# EAGLE board vibro4-1 copy (EAGLE 5.04)
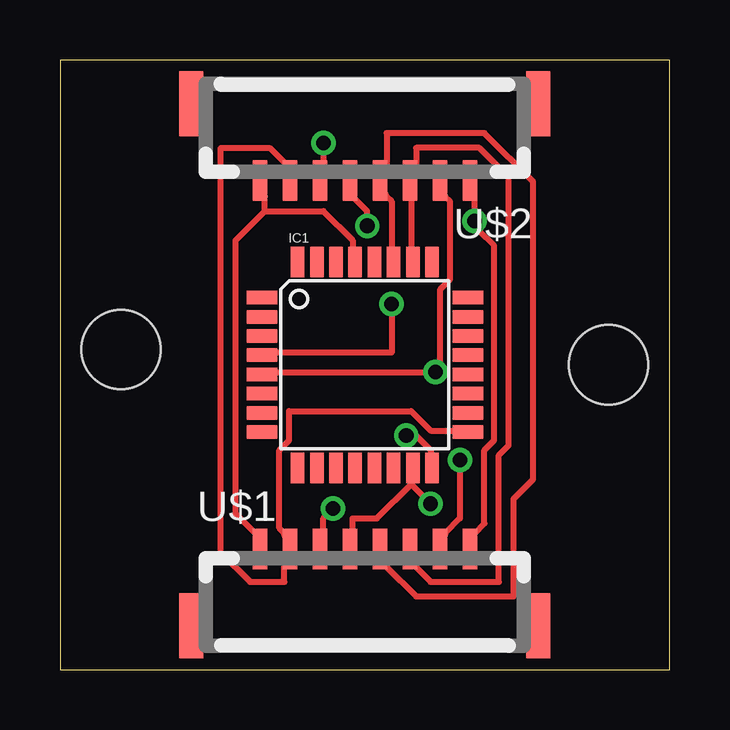
[diagram p0: board, top side]
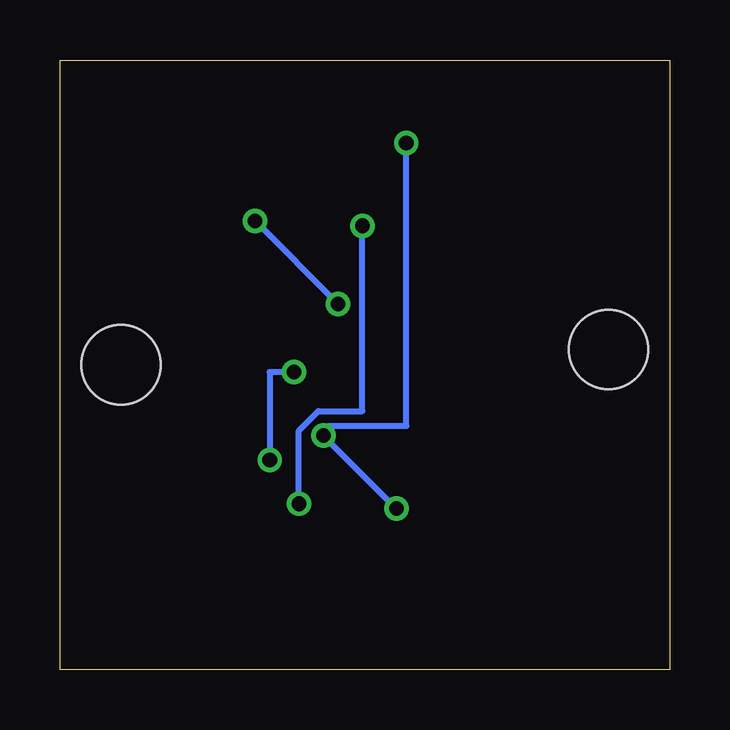
[diagram p1: board, bottom side, seen from below]

Size 25.4 x 25.4 mm. Coordinates in mm from the lower left corner, seen from the top.
Outline: 0,0 25.4,0 25.4,25.4 0,25.4 0,0
Copper layers (1*16): Top 0.035mm / dielectric 1.5mm / Bottom 0.035mm
Design rules "default": minimum track width 10mil, minimum drill 24mil, track to track 8mil, track to pad 8mil, pad to pad 8mil, via to via 8mil, smd to smd 8mil, copper to edge 40mil, drill to drill 8mil, minimum pad ring 10mil, minimum via ring 8mil, stop-mask expansion 4mil, vias tented up to drill 0mil, thermal gap 10mil

## Footprints (pad centres in the part's own frame; a part is rotated, then mirrored left to right if it is on the bottom)
TQFP32-08 = smd 1.27 x 0.559: 1 -4.293,2.8; 2 -4.293,2; 3 -4.293,1.2; 4 -4.293,0.4; 5 -4.293,-0.4; 6 -4.293,-1.2; 7 -4.293,-2; 8 -4.293,-2.8; 17 4.293,-2.8; 18 4.293,-2; 19 4.293,-1.2; 20 4.293,-0.4; 21 4.293,0.4; 22 4.293,1.2; 23 4.293,2; 24 4.293,2.8 | smd 0.559 x 1.27: 9 -2.8,-4.293; 10 -2,-4.293; 11 -1.2,-4.293; 12 -0.4,-4.293; 13 0.4,-4.293; 14 1.2,-4.293; 15 2,-4.293; 16 2.8,-4.293; 25 2.8,4.293; 26 2,4.293; 27 1.2,4.293; 28 0.4,4.293; 29 -0.4,4.293; 30 -1.2,4.293; 31 -2,4.293; 32 -2.8,4.293
SM08B-GHS-TB = smd 0.6 x 1.7: P$1 -4.375,1.85; P$2 -3.125,1.85; P$3 -1.875,1.85; P$4 -0.625,1.85; P$5 0.625,1.85; P$6 1.875,1.85; P$7 3.125,1.85; P$8 4.375,1.85 | smd 1 x 2.7: P$9 7.225,-1.35; P$10 -7.225,-1.35
STAND-OFF = hole 3.302: 0,0

## Placement (x,y rotation side)
IC1  ATTINY48  [TQFP32-08]  12.7,12.7 0 top
U$1  SM08B-GHS-TB  [SM08B-GHS-TB]  12.7,3.17 0 top
U$2  SM08B-GHS-TB  [SM08B-GHS-TB]  12.7,22.23 180 top
U$4  STAND-OFF  [STAND-OFF]  2.54,13.34 0 top
U$5  STAND-OFF  [STAND-OFF]  22.86,12.7 0 top

## Library data of the parts
IC1 U$4 U$5 = SparkFun
U$1 U$2 = con-jst-cubic

## Nets
N$1: IC1.4 U$1.P$8 U$2.P$1
N$2: IC1.5 U$1.P$7 U$2.P$2
N$3: IC1.26 U$1.P$6 U$2.P$3
N$4: IC1.27 U$1.P$5 U$2.P$4
N$5: IC1.15 U$1.P$4 U$2.P$5
N$6: IC1.16 U$1.P$3 U$2.P$6
N$7: IC1.17 U$1.P$2 U$2.P$7
N$8: IC1.29 U$1.P$1 U$2.P$8

## Tracks (layer width: path | path; a pad name or v marks a point on that pad's centre or on a via)
N$1  (via drill 0.61)
  Top 0.254: v13.82,15.24 13.82,13.21 8.94,13.21 IC1.4 | U$2.P$1 17.27,19.71 v17.27,18.69 17.48,18.29 18.09,17.68 18.09,9.55 17.68,9.14 17.68,6.1 17.27,5.69 U$1.P$8
  Bottom 0.254: v17.27,18.69 v13.82,15.24
N$2  (via drill 0.61)
  Top 0.254: IC1.5 8.94,12.39 v15.65,12.39 15.85,12.39 15.85,15.85 16.26,16.26 16.26,19.51 16.05,19.71 U$2.P$2 | v16.66,8.74 16.66,6.3 16.05,5.69 U$1.P$7
  Bottom 0.254: v16.66,8.74 16.66,12.39 v15.65,12.39
N$3
  Top 0.254: IC1.26 14.63,17.48 14.63,19.71 U$2.P$3 14.83,21.13 14.83,21.74 17.48,21.74 18.69,20.52 18.69,9.35 18.29,8.94 18.29,3.66 15.44,3.66 14.83,4.27 U$1.P$6
N$4
  Top 0.254: IC1.27 13.82,17.48 13.82,19.51 13.61,19.71 U$2.P$4 13.61,21.13 13.61,22.35 17.68,22.35 19.71,20.32 19.71,7.92 18.9,7.11 18.9,3.05 14.83,3.05 13.61,4.27 U$1.P$5
N$5  (via drill 0.61)
  Top 0.254: 14.63,7.72 14.63,7.92 IC1.15 | 14.63,7.72 13.21,6.3 12.19,6.3 12.19,5.69 U$1.P$4 | v12.8,18.49 12.8,19.1 12.19,19.71 U$2.P$5 | 14.63,7.72 v15.44,6.91
  Bottom 0.254: v12.8,18.49 12.8,10.77 14.63,10.77 15.44,9.96 v15.44,6.91
N$6  (via drill 0.61)
  Top 0.254: v14.43,9.75 14.83,9.75 15.44,9.14 15.44,8.94 IC1.16 | v11.38,6.71 10.97,6.3 10.97,5.69 U$1.P$3 | v10.97,21.95 10.97,21.13 U$2.P$6
  Bottom 0.254: v11.38,6.71 v14.43,9.75 14.22,10.16 10.97,10.16 v10.97,21.95
N$7
  Top 0.254: IC1.17 16.46,9.96 15.44,9.96 14.63,10.77 9.55,10.77 9.55,9.55 9.14,9.14 9.14,5.89 9.35,5.69 U$1.P$2 9.35,4.27 9.35,3.66 7.92,3.66 6.71,4.88 6.71,21.74 8.74,21.74 9.35,21.13 U$2.P$7
N$8
  Top 0.254: 8.53,19.1 10.97,19.1 12.19,17.88 12.19,17.48 IC1.29 | 8.53,19.1 8.53,19.71 U$2.P$8 | 8.53,19.1 7.32,17.88 7.32,6.5 8.13,5.69 U$1.P$1